# Altium PCB PCB1.PcbDoc
Units mm, origin at the board's own origin, x right, y up, seen from the top; angles counter-clockwise.
Board outline 50.01 x 50 mm, 2 copper layers (Top Layer, Bottom Layer); 27 components, 17 nets, 70 pads, 12 vias.
Unrouted connection lines stored in the file: 78.
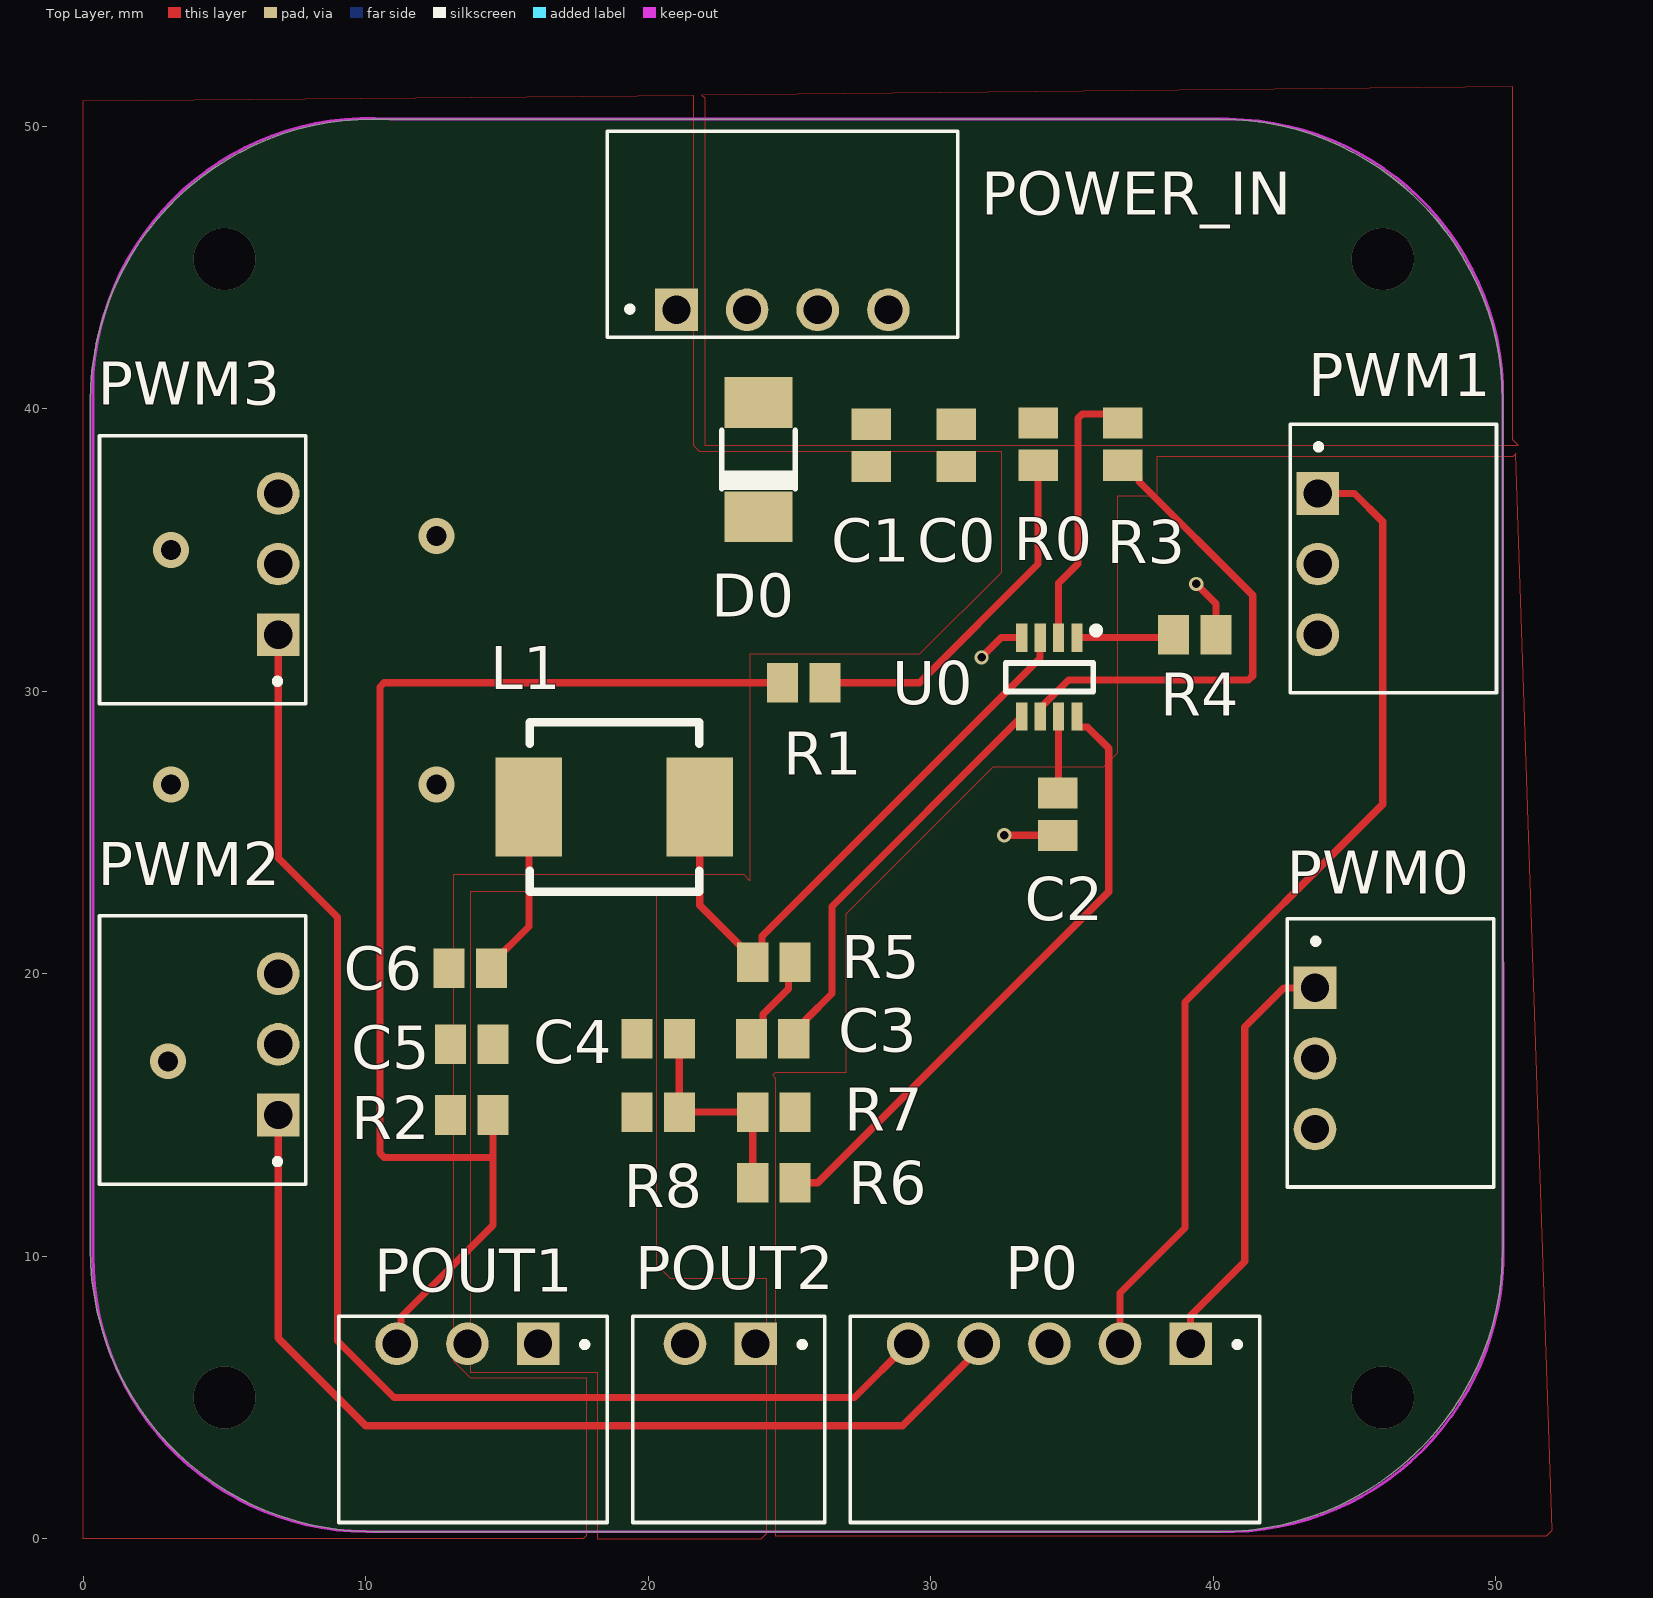
[diagram p0: Top Layer view]
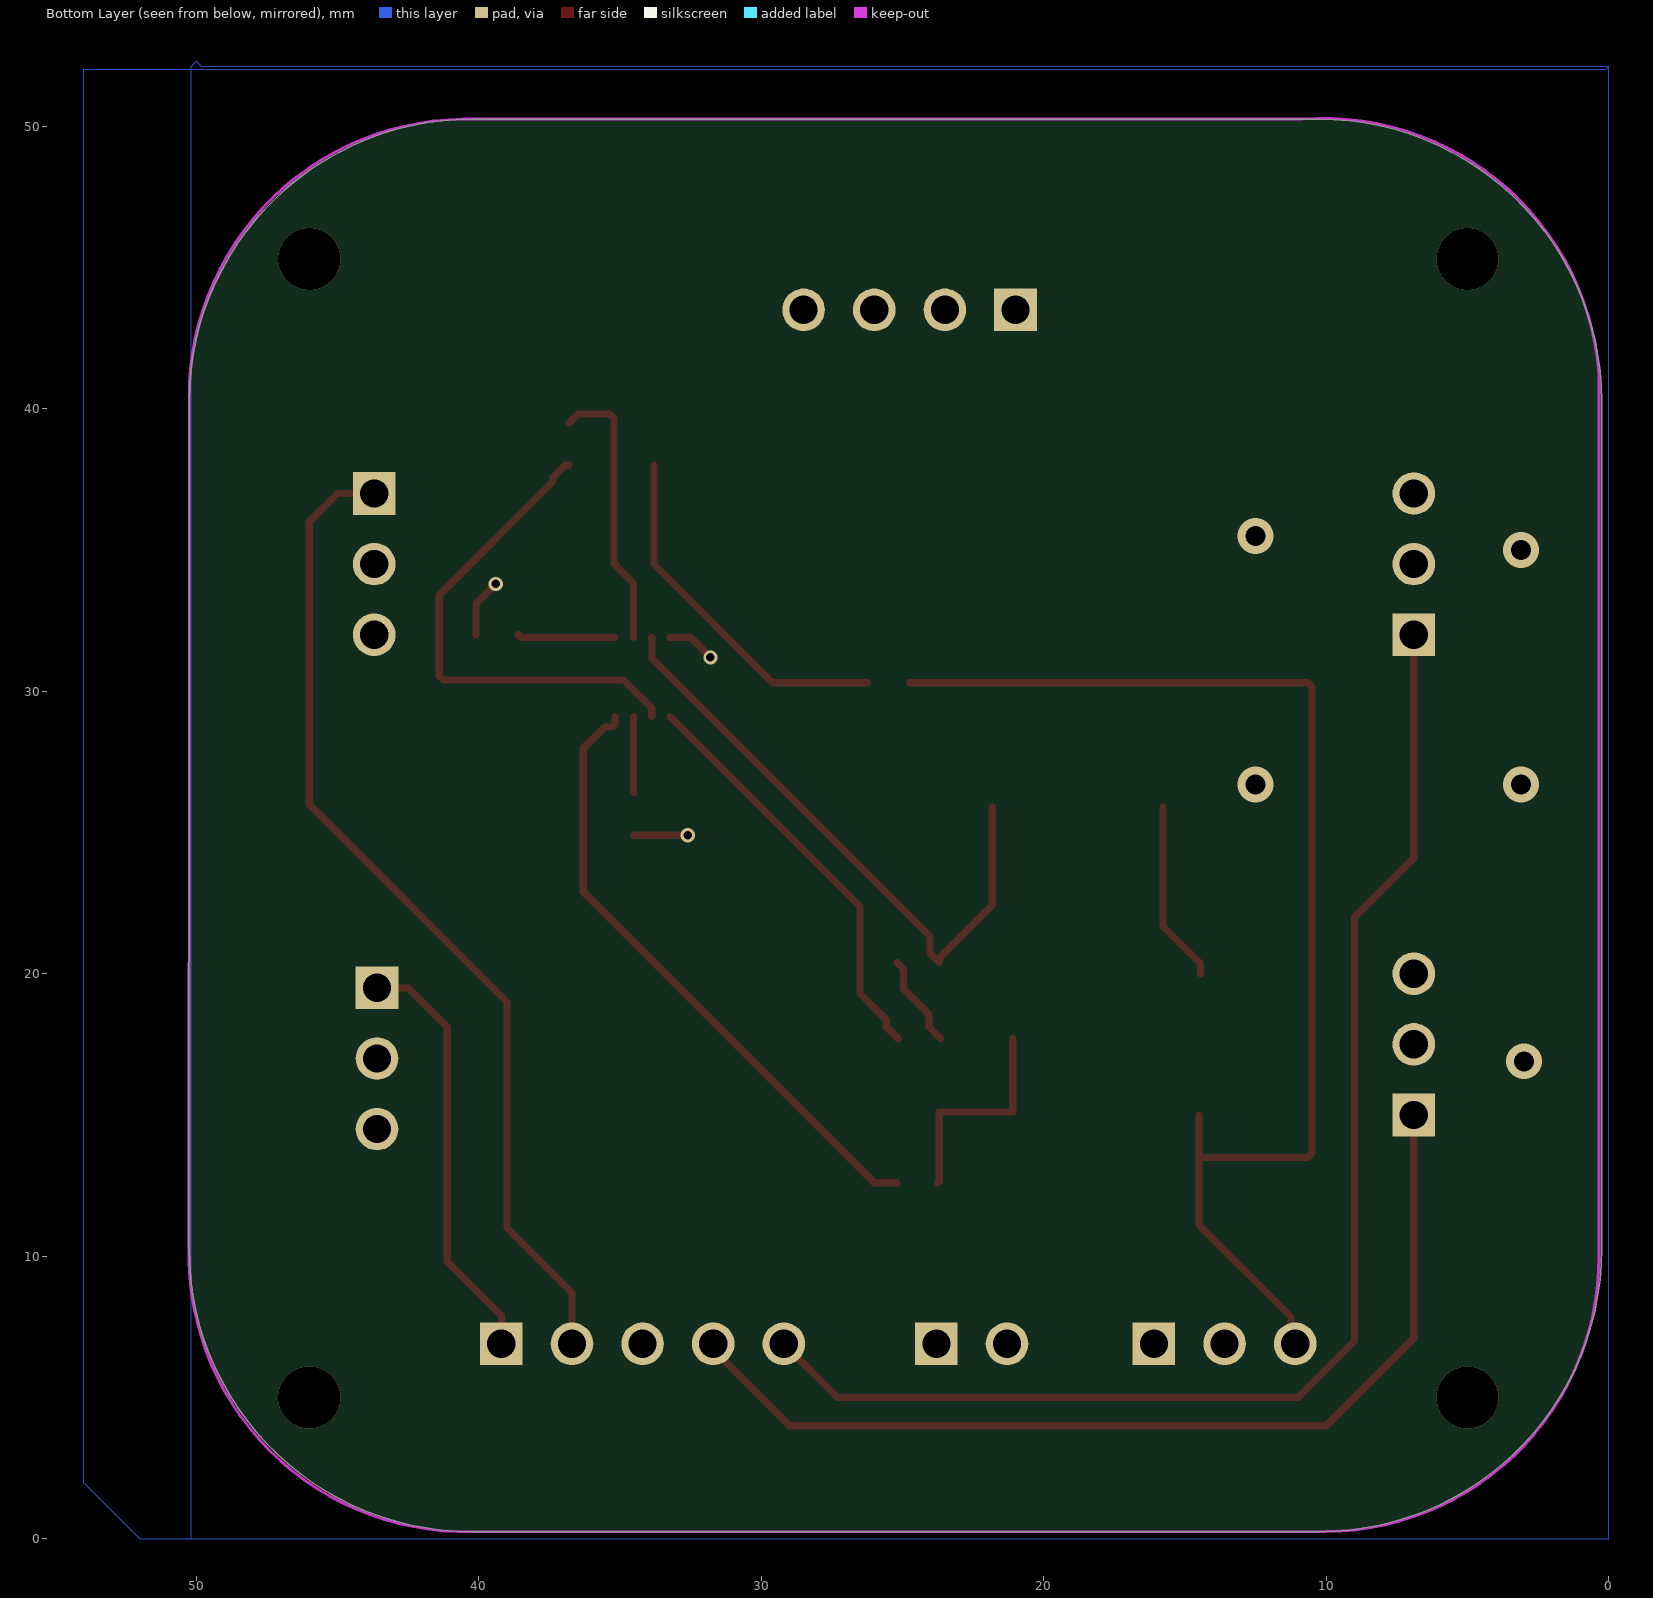
[diagram p1: Bottom Layer view, seen from below]

## Layer stack, top to bottom
Top Solder: solder mask 0.0102, Solder Resist, Dk 3.5
Top Layer: signal copper 0.0356
Dielectric 1: dielectric 0.32, FR-4, Dk 4.8
Bottom Layer: signal copper 0.0356
Bottom Solder: solder mask 0.0102, Solder Resist, Dk 3.5

## Board outline
0.25,10.25 0.25,40.25 cw(c10.25,40.25) 10.25,50.25 40.25,50.25 cw(c40.25,40.25) 50.25,40.25 50.25,20.44 50.26,20.44 50.26,10.252 50.25,10.25 cw(c40.25,10.25) 40.25,0.25 10.25,0.25 cw(c10.25,10.25)

## Design rules (kind name [scope] priority, off if disabled: settings)
Clearance [All] p1: gap=0.1 ignorepadtopadclearanceinfootprint=FALSE except(0.01: Arc-SMDPad Arc-THPad Arc-Hole Track-SMDPad Track-THPad Track-Hole SMDPad-SMDPad SMDPad-THPad)
DiffPairsRouting [All] p1: maxlimit=0.4 minlimit=0.3 mostfreqgap=0.3 toplayer_minwidth=0.381 toplayer_maxwidth=0.381 toplayer_prefwidth=0.381 bottomlayer_minwidth=0.381 bottomlayer_maxwidth=0.381 bottomlayer_prefwidth=0.381 maxuncoupledlength=12.7
MinimumSolderMaskSliver [All] p1: minsoldermaskwidth=0.01
PlaneConnect [All] p1: planeconnectstyle=Relief reliefexpansion=0.508 reliefentries=4 reliefconductorwidth=0.5 reliefairgap=0.5
PolygonConnect [All] p1: connectstyle=Relief reliefconductorwidth=0.5 reliefentries=4 polygonreliefangle="90 Angle" airgapwidth=0.5
RoutingVias [All] p1: holewidth=0.3 width=0.5 viastyle="Through Hole" minholewidth=0.3 minwidth=0.5 maxholewidth=0.3 maxwidth=0.5
SilkToSilkClearance [All] p1: silktosilkclearance=0
SilkToSolderMaskClearance [IsPad] p1: minsilkscreentomaskgap=0 clearancetoexposedcopper=TRUE
SolderMaskExpansion [IsVia] p1: expansion=0.102 istentingtop=TRUE
Width [All] p1: maxlimit=0.254 minlimit=0.1 preferedwidth=0.254 minimp=50.000000 maximp=50.000000 favimp=50.000000
25 further rules are at their usual default settings.

## Components (designator, comment, footprint, x,y, rotation, side; value= is the part's Value field where it differs from the comment)
C0 "22uF/25V(20%)" C0805 30.9,38.7 r90 top
C1 "0.1uF/16V(10%)" C0805 27.9,38.7 r90 top
C2 "0.1uF/25V" C0805 34.5,25.65 r90 top
C3 "0.1uF/25V" C0805 24.4,17.7 r180 top
C4 "33pF" C0805 20.35,17.7 r180 top
C5 "22uF/25V(20%)" C0805 13.75,17.5 r0 top
C6 "0.1uF/16V(10%)" C0805 13.7,20.2 r0 top
D0 "SMAJ12CA" DO-214AC 23.9,38.2 r90 top
L1 "4.7uH" INDC6060X300 18.8,25.9 r180 top
P0 "Header 5" XH2.54-5P 35.45,7.875 r180 top
POUT1 "Header 3" XH2.54-3P 12.35,7.875 r180 top (schematic designator POWER_OUT)
POUT2 "Header 2" XH2.54-2P 20.05,7.875 r180 top (schematic designator POWER_OUT2)
POWER_IN "SWD" XH2.54-4P 24.75,42.525 r0 top
PWM0 "Header 3" XH2.54-3P 42.625,15.75 r270 top
PWM1 "Header 3" XH2.54-3P 42.725,33.25 r270 top
PWM2 "Header 3" XH2.54-3P 7.875,18.75 r90 top
PWM3 "Header 3" XH2.54-3P 7.875,35.75 r90 top
R0 "100K" C0805 33.8,38.75 r270 top
R1 "100K" C0805 25.5,30.3 r180 top
R2 "100K" C0805 13.75,15 r0 top
R3 "100K" C0805 36.8,38.75 r270 top
R4 "75K" C0805 39.35,32 r180 top
R5 "20" C0805 24.45,20.4 r180 top
R6 "20K" C0805 24.45,12.6 r180 top
R7 "7.5K" C0805 24.45,15.1 r0 top
R8 "40.2K" C0805 20.35,15.1 r180 top
U0 "DC MP2315" SOT23-8L 34.2,30.5 r180 top

## Footprints (in the part's own frame and the unit in brackets; to place one, negate y for a bottom-side part, rotate by r counter-clockwise, add the part's x,y. Pads: shape width x height; smd on the part's side, far side on the other; paste and mask are expansions set on the pad)
C0805 [mm] "Chip Capacitor, Body 2.0x1.3mm, IPC High Density"
  rect 1.1x1.4 smd: 1(-0.75,0) 2(0.75,0)
  body extent -1.1,-0.72 1.1,0.72, height 1.4
DO-214AC [mm]
  rect 1.8x2.4 smd: A(2.025,0) C(-2.025,0)
  silkscreen extent -1.06,-1.3 1.02,1.3
INDC6060X300 [mm]
  rect 2.35x3.5 smd: 1(-3.025,0) 2(3.025,0)
  silkscreen extent -3,-3 3,3, body extent -3.55,-3 3.55,3, height 3
SOT23-8L [mm]
  rect 0.4x1 smd: 1(-0.975,-1.397) 2(-0.325,-1.397) 3(0.325,-1.397) 4(0.975,-1.397) 5(0.975,1.397) 6(0.325,1.397) 7(-0.325,1.397) 8(-0.975,1.397)
  silkscreen extent -1.78,-1.78 1.55,0.51, body extent -1.5,-1.4 1.5,1.4, height 1.15
XH2.54-2P [mm]
  rect 1.508x1.508 hole 1: 1(-3.75,0.975)
  round 1.508 hole 1: 2(-1.25,0.975)
  silkscreen extent -6.2,0 0.6,7.3
XH2.54-3P [mm]
  rect 1.508x1.508 hole 1: 1(-3.75,0.975)
  round 1.508 hole 1: 2(-1.25,0.975) 3(1.25,0.975)
  silkscreen extent -6.2,0 3.3,7.3
XH2.54-4P [mm]
  rect 1.508x1.508 hole 1: 1(-3.75,0.975)
  round 1.508 hole 1: 2(-1.25,0.975) 3(1.25,0.975) 4(3.75,0.975)
  silkscreen extent -6.2,0 6.2,7.3
XH2.54-5P [mm]
  rect 1.508x1.508 hole 1: 1(-3.75,0.975)
  round 1.508 hole 1: 2(-1.25,0.975) 3(1.25,0.975) 4(3.75,0.975) 5(6.25,0.975)
  silkscreen extent -6.2,0 8.3,7.3

## Part data
C0 C1 C2 C3 C4 C5 C6: library part Cap, "Capacitor", LatestRevisionDate=17-Jul-2002, LatestRevisionNote="Re-released for DXP Platform.", PackageDescription="Radial Cap, Thru-Hole; 2 Leads; 0.3 in Pin Spacing", PackageReference=RAD-0.3, Published=8-Jun-2000, Publisher="Altium Limited"
D0: "19.9V Clamp 20.1A Ipp Tvs Diode Surface Mount SMAJ _DO-214AC_", Package="DO-214AC-214 Taiwan Semiconductor", Availability=Unavailable, MF="Taiwan Semiconductor", MP=SMAJ12CA, Price=None, SnapEDA_Link=https://www.snapeda.com/parts/SMAJ12CA/Taiwan%20Semiconductor/view-part/2769109/?ref=snap
L1: library part L-NR, "NR功率电感", BOM名称=NR功率电感, 学习资源=www.ooocke.com, 版权归属=源创客
P0: "Header, 5-Pin", LatestRevisionDate=17-Jul-2002, LatestRevisionNote="Re-released for DXP Platform.", Publisher="Altium Limited"
POUT1 PWM0 PWM1 PWM2 PWM3: "Header, 3-Pin", LatestRevisionDate=17-Jul-2002, LatestRevisionNote="Re-released for DXP Platform.", Publisher="Altium Limited"
POUT2: "Header, 2-Pin", LatestRevisionDate=17-Jul-2002, LatestRevisionNote="Re-released for DXP Platform.", Publisher="Altium Limited"
POWER_IN: library part "Header 4", "4P接插件", BOM名称=4P接插件, 学习资源=www.ooocke.com, 版权归属=源创客
R0 R1 R2 R3 R4 R5 R6 R7 R8: library part Res1, "Resistor", LatestRevisionDate=17-Jul-2002, LatestRevisionNote="Re-released for DXP Platform.", PackageDescription="Axial Device, Thru-Hole; 2 Leads; 0.3 in Pin Spacing", PackageReference=AXIAL-0.3, Published=8-Jun-2000, Publisher="Altium Limited"
U0: "DC降压芯片"

## Via types
v1: diameter 1.27, hole 0.711, Top Layer to Bottom Layer, tented both sides, 5 vias
v2: diameter 2.2, hole 2.2, Top Layer to Bottom Layer, tented both sides, 4 vias
v3: diameter 0.5, hole 0.3, Top Layer to Bottom Layer, tented both sides, 3 vias

## Nets (pads, with @x,y where several pads share a name; then routed paths per layer and width w, separated by ;. In a path a pad name is that pad's centre, name@x,y a point inside that pad or via, vN(x,y) a via of type N, cw(c..) or ccw(c..) an arc to the next point about the centre after c; other vN are vias at no path point)
GND: C0.1 C1.1 C2.1 C5.1 C6.1 D0.C POUT1.2 POUT2.2 POWER_IN.1 PWM0.3 PWM1.3 PWM2.3 PWM3.3 R2.1 R4.1 R7.2 U0.4 | length 5.7
  Top Layer w0.254: v3(31.8,31.2) 32.497,31.897 U0.4 ; v3(32.6,24.9) C2.1 ; v3(39.4,33.8) 40.1,33.1 R4.1
  other v1: 12.5,26.7 12.5,35.5
NetC2_2: C2.2 U0.7 | length 2.7
  Top Layer w0.254: C2.2 34.525,26.425 U0.7
NetC3_1: C3.1 U0.5 | length 14.7
  Top Layer w0.254: C3.1 25.573,18.123 25.573,18.373 26.5,19.3 26.5,22.378 U0.5
NetC3_2: C3.2 R5.1 | length 3.3
  Top Layer w0.254: C3.2 24.065,18.115 24.065,18.565 24.968,19.468 24.968,20.168 R5.1
NetC4_1: C4.1 R6.2 R7.1 R8.1 | length 7.7
  Top Layer w0.254: C4.1 R8.1 R7.1 23.7,12.65 R6.2@23.75,12.6
NetL1_1: L1.1 R5.2 U0.3 | length 22
  Top Layer w0.254: L1.1 21.825,22.425 23.7,20.55 R5.2 24.032,20.732 24.032,21.332 33.871,31.171 33.871,31.893 U0.3
NetR0_2: R0.2 R1.1 | length 12.8
  Top Layer w0.254: R1.1 29.6,30.3 33.8,34.5 R0.2
NetR3_2: R3.2 U0.6 | length 17.7
  Top Layer w0.254: U0.6 33.875,29.403 34.872,30.4 41.251,30.4 41.4,30.549 41.4,33.4 37.373,37.427 37.373,37.577 36.95,38 R3.2
NetR4_2: R4.2 U0.1 | length 3.5
  Top Layer w0.254: U0.1 38.497,31.897 R4.2
NetR6_1: R6.1 U0.8 | length 22.2
  Top Layer w0.254: R6.1 26,12.6 36.3,22.9 36.3,27.978 35.54,28.738 35.248,28.738 35.175,28.811 U0.8
PWM_S0: P0.1 PWM0.1 | length 15.1
  Top Layer w0.254: P0.1 39.2,7.9 41.113,9.814 41.113,18.113 42.5,19.5 PWM0.1
PWM_S1: P0.2 PWM1.1 | length 35.7
  Top Layer w0.254: P0.2 36.7,8.7 39,11 39,19 46,26 46,36 45,37 PWM1.1
PWM_S2: P0.4 PWM2.1 | length 35.3
  Top Layer w0.254: PWM2.1 6.9,7.1 10,4 29,4 P0.4@31.839,6.839
PWM_S3: P0.5 PWM3.1 | length 47.7
  Top Layer w0.254: PWM3.1 6.9,24.1 9,22 9,7 11,5 27.3,5 P0.5
VBAT: C0.2 C1.2 D0.A POWER_IN.4 R0.1 R3.1 U0.2 | length 9.8
  Top Layer w0.254: U0.2 34.525,33.825 35.211,34.511 35.211,39.665 35.36,39.814 36.486,39.814 R3.1
VCC5: C4.2 C5.2 C6.2 L1.2 POUT1.1 POUT2.1 R8.2 | length 6.4
  Top Layer w0.254: C6.2@14.45,20 C6.2 14.45,20.35 15.775,21.675 L1.2
VREF: POUT1.3 R1.2 R2.2 | length 44.4
  Top Layer w0.254: POUT1.3 11.249,7.049 11.249,7.849 14.5,11.1 14.5,13.5 ; R2.2 14.5,13.5 ; R1.2 10.649,30.3 10.5,30.151 10.5,13.649 10.649,13.5 14.5,13.5
pads on no net: P0.3 POWER_IN.2 POWER_IN.3 PWM0.2 PWM1.2 PWM2.2 PWM3.2
copper on no net:
  other v1: 3,16.9 3.1,26.7 3.1,35
  other v2: 5,5 46,5 5,45.3 46,45.3

## Polygon pours and split planes (outlines as drawn)
no net on Bottom Layer "NONET_L02_P004" (solid, shelved, pour order 4): 0,52.1 0.1,52 54,52 54,2 52,0 0,0
GND on Bottom Layer "NONET_L02_P003" (solid, remove dead copper, shelved, pour order 3): 0,52.1 49.8,52.1 50,52.3 50.2,52.1 50.2,0 0,0
VCC5 on Top Layer "NONET_L01_P006" (solid, shelved, pour order 6): 13.7,22.9 13.7,5.9 18.2,5.9 18.2,0 24,0 24.2,0.2 24.2,9.2 20.8,9.2 20.3,9.7 20.3,22.9
GND on Top Layer "NONET_L01_P009" (solid, shelved, pour order 9): 50.7,38.4 50.6,38.3 38,38.3 38,36.8 37.9,36.9 36.6,36.9 36.6,27.8 36.1,27.3 32.2,27.3 27,22.1 27,16.5 24.5,16.5 24.4,16.4 24.5,16.3 24.5,0.1 51.8,0.1 52,0.3
GND on Top Layer "TOP_GND" (solid, shelved, pour order 7): 21.6,51.1 21.6,38.7 21.8,38.5 32.5,38.5 32.5,34.2 29.6,31.3 23.6,31.3 23.6,23.3 23.4,23.5 13.1,23.5 13.1,6.3 13.7,5.7 17.8,5.7 17.8,0.1 17.7,0 0,0 0,50.9
VBAT on Top Layer "NONET_L01_P005" (solid, shelved, pour order 5): 21.9,51.1 22,51 22,38.7 50.8,38.7 50.6,38.9 50.6,51.4

## Keep-outs
Keep-Out Layer:
  lines w0.1: 50.25,20.4 50.25,40.32 ; 50.25,40.35 ccw(c40.45,40.45) 40.55,50.25 10.85,50.25 ccw(c10.1,40.5) 0.35,41.25 0.351,10.015 ccw(c10.062,9.962) 10.009,0.251 40.74,0.25 ccw(c40.476,10.026) 50.251,10.29 50.251,20.4

## Silkscreen, mask and mechanical layers (free items; w line width, h text height)
Mechanical 1:
  lines w0.254: 0.27,10.127 0.271,40.457 cw(c10.16,40.44) 10.177,50.329 40.397,50.339 cw(c40.38,40.45) 50.269,40.433 ; 0.281,10.127 ccw(c10.17,10.11) 10.153,0.221 ; 9.35,0.23 40.9,0.231 ccw(c40.916,9.497) 50.182,9.481 50.27,40.433